# Altium PCB Module Board.PcbDoc (part 6 of 6)
Units mm, origin at the board's own origin, x right, y up, seen from the top; angles counter-clockwise.
Board outline 300 x 80 mm, 4 copper layers (Top Layer, GND1-Layer, GND2-Layer, Bottom Layer), stack 1.586 mm thick; 425 components, 248 nets, 1063 pads, 936 vias.
Unrouted connection lines stored in the file: 3.
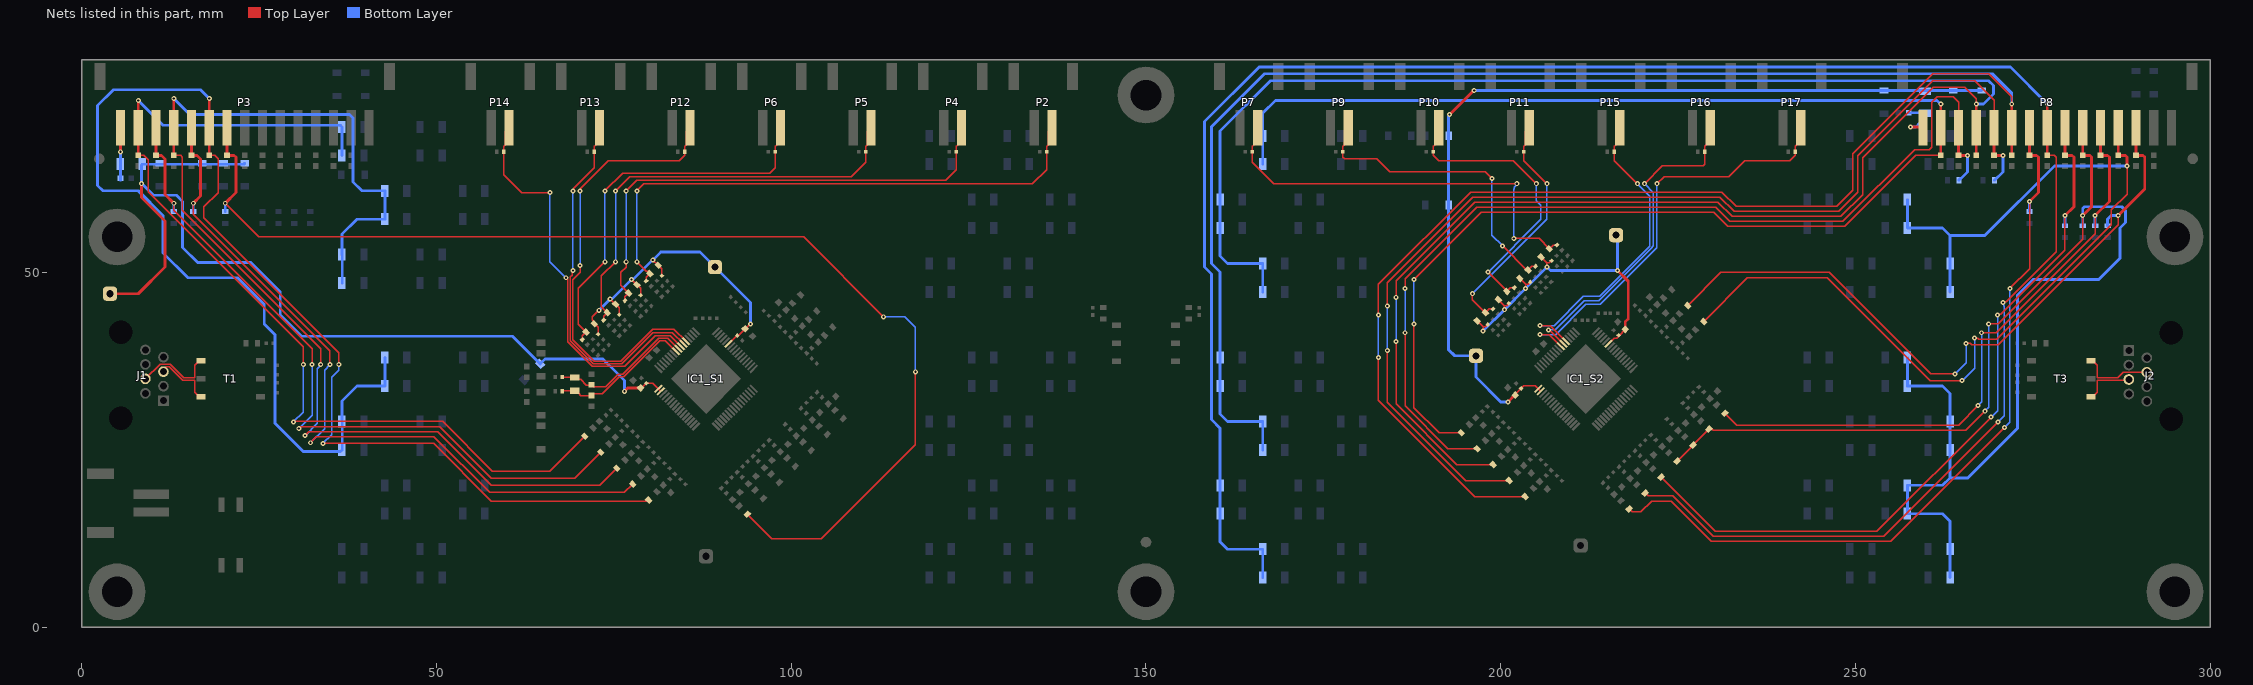
[diagram p7: the nets of this part, all layers, seen from the top]

## Via types
v1: diameter 0.7, hole 0.3, Top Layer to Bottom Layer, 936 vias

## Nets (pads, with @x,y where several pads share a name; then routed paths per layer and width w, separated by ;. In a path a pad name is that pad's centre, name@x,y a point inside that pad or via, vN(x,y) a via of type N, cw(c..) or ccw(c..) an arc to the next point about the centre after c; other vN are vias at no path point) (continued)
S1_CELL7: C30_S1.2 P3.9 R19_S1.2 R20_S1.2 | length 165.1
  Top Layer w0.2: v1(20.25,59.75) 25,55 101.75,55 v1(113,43.75) ; R20_S1.2@93.835,15.915 97.25,12.5 104.25,12.5 117.5,25.75 v1(117.5,36)
  Top Layer w0.4: v1(20.25,59.75) 21.75,61.25 21.75,66.25 21.5,66.5 C30_S1.2@20.5,66.5 P3.9@20.5,70.4
  Bottom Layer w0.2: v1(113,43.75) 116,43.75 117.5,42.25 v1(117.5,36)
  Bottom Layer w0.4: R19_S1.2@20.25,58.577 v1(20.25,59.75)
S1_CELL8: C26_S1.2 P3.10 R17_S1.2 R57_RB_C81.1 R57_RB_C91.1 R59_RB_C81.1 R59_RB_C91.1 | length 216.9
  Top Layer w0.2: C26_S1.2@18,66.5 18.75,66.5 19.25,66 19.25,61.25 17.25,59.25 17.25,57.68 36.25,38.68 v1(36.25,37) ; v1(34,25.9) 49.6,25.9 57.75,17.75 79.527,17.75 79.692,17.915 R17_S1.2@79.915,17.915
  Top Layer w0.4: C26_S1.2@18,66.55 P3.10@18,70.45 ; P3.10@18,70.4 v1(18,74.5)
  Bottom Layer w0.2: v1(34,25.9) 35.25,27.15 35.25,35.25 36.25,36.25 v1(36.25,37)
  Bottom Layer w0.4: v1(18,74.5) 16.75,75.75 4.5,75.75 2.25,73.5 2.25,62.25 3,61.5 8,61.5 11.5,58 11.5,52.75 15,49.25 22,49.25 25.75,45.5 25.75,42.727 27.25,41.227 27.25,28.75 31.25,24.75 36.448,24.75 R57_RB_C81.1@36.698,25 ; R59_RB_C81.1@36.698,29 36.698,31.9 38.798,34 42.746,34 R59_RB_C91.1@42.746,38 ; R57_RB_C81.1@36.746,25 R59_RB_C81.1@36.746,29
S1_CELL9: C19_S1.2 P3.11 R11_S1.1 R13_S1.2 | length 105.6
  Top Layer w0.2: v1(15.75,59.75) 15.75,58.19 35,38.94 v1(35,37) ; v1(32.25,26) 33.1,26.85 49.65,26.85 57.5,19 76.5,19 R13_S1.2@77.665,20.165
  Top Layer w0.4: P3.11@15.5,70.4 C19_S1.2@15.5,66.5 16.25,66.5 16.75,66 16.75,60.75 v1(15.75,59.75)
  Bottom Layer w0.2: v1(32.25,26) 34.25,28 34.25,36.21 35,36.96 v1(35,37)
  Bottom Layer w0.4: R11_S1.1@15.75,58.577 v1(15.75,59.75)
S1_CELL10: C13_S1.2 P3.12 R9_S1.2 R57_RB_C101.1 R57_RB_C1111.1 R59_RB_C101.1 R59_RB_C1111.1 | length 164
  Top Layer w0.2: C13_S1.2@13,66.5 13.966,66.5 14.2,66.266 14.2,58.75 33.7,39.25 v1(33.7,37.003) ; v1(31.5,27) 31.5,27.039 32.011,27.55 50.21,27.55 57.76,20 73,20 R9_S1.2@75.415,22.415
  Top Layer w0.4: C13_S1.2@13,66.5 P3.12@13,70.4 v1(13,74.5)
  Bottom Layer w0.2: v1(31.5,27) 33.25,28.75 33.25,36.445 33.7,36.895 v1(33.7,37.003)
  Bottom Layer w0.4: v1(13,74.5) 15.25,72.25 37.75,72.25 38.25,71.75 38.25,62.75 39.5,61.5 R57_RB_C1111.1@42.698,61.5 ; R59_RB_C101.1@36.698,52.5 36.698,55.4 38.798,57.5 42.746,57.5 R57_RB_C1111.1@42.746,61.5 ; R57_RB_C101.1@36.746,48.5 R59_RB_C101.1@36.746,52.5
S1_CELL11: C5_S1.2 P3.13 R4_S1.2 R7_S1.2 | length 101.1
  Top Layer w0.2: v1(13,59.75) 13,58.74 32.5,39.24 32.5,37.024 v1(32.486,37.01) ; v1(30.617,28) 30.867,28.25 50.5,28.25 57.75,21 69.5,21 R7_S1.2@73.165,24.665
  Top Layer w0.4: P3.13@10.5,70.4 C5_S1.2@10.5,66.5 11.25,66.5 11.75,66 11.75,61 v1(13,59.75)
  Bottom Layer w0.2: v1(30.617,28) 32.486,29.869 v1(32.486,37.01)
  Bottom Layer w0.4: R4_S1.2@13,58.577 v1(13,59.75)
S1_CELL12: C1_S1.2 P3.14 R1_S1.2 R57_RB_C121.1 R59_RB_C121.1 | length 136.2
  Top Layer w0.2: C1_S1.2@8,66.5 8.75,66.5 9.4,65.85 9.4,61.35 31.25,39.5 v1(31.25,37) ; v1(29.855,28.927) 29.928,29 50.881,29 57.881,22 66,22 R1_S1.2@70.915,26.915
  Top Layer w0.4: C1_S1.2@8,66.5 P3.14@8,70.4 v1(8,74.25)
  Bottom Layer w0.2: v1(29.855,28.927) 31.25,30.322 v1(31.25,37)
  Bottom Layer w0.4: v1(8,74.25) 11.5,70.75 36.448,70.75 R57_RB_C121.1@36.698,70.5 R59_RB_C121.1@36.698,66.5
S1_GPIO4: IC1_S1.53 P12.1 R61_S1.1 | length 62.3
  Top Layer w0.2: v1(70.25,51) 70.25,50 69.25,49 69.25,40.5 72.25,37.5 76.01,37.5 80.51,42 81.775,42 83.475,42 IC1_S1.53@85.18,40.295 ; v1(70.25,61.5) 70.346,61.596 70.346,61.846 74.25,65.75 84.25,65.75 85,66.5 85,67.75 85.2,67.95 85.2,69.85 P12.1@85.75,70.4
  Bottom Layer w0.2: v1(70.25,51) v1(70.25,61.5)
S1_GPIO5: IC1_S1.54 P13.1 R62_S1.1 | length 51.4
  Top Layer w0.2: v1(69.25,50.25) 69.154,50.154 69.154,49.619 68.9,49.365 68.9,40.355 72.105,37.15 76.155,37.15 80.505,41.5 81.275,41.5 83.268,41.5 IC1_S1.54@84.827,39.941 ; v1(69.25,61.5) 69.346,61.596 69.346,61.846 72.25,64.75 R62_S1.1@72.25,67 72.25,67.75 72.45,67.95 72.45,69.85 P13.1@73,70.4
  Bottom Layer w0.2: v1(69.25,50.25) v1(69.25,61.5)
S1_GPIO6: IC1_S1.55 P14.1 R63_S1.1 | length 56.4
  Top Layer w0.2: P14.1@60.25,70.4 59.7,69.85 59.7,67.95 59.5,67.75 R63_S1.1@59.5,67 59.5,63.75 62,61.25 v1(66,61.25) ; v1(68.25,49.25) 68.3,49.25 68.55,49 68.55,40.21 71.96,36.8 76.575,36.8 80.875,41.1 82.961,41.1 IC1_S1.55@84.473,39.588
  Bottom Layer w0.2: v1(66,61.25) 66,51.5 v1(68.25,49.25)
S1_ISENSE_N: C66.1 C68.2 IC1_S1.57 R52.2 | length 20.1
  Top Layer w0.2: R52.2@67.75,33.25 67.8,33.3 69.7,33.3 70.05,32.95 70.35,32.65 C68.2@71.85,32.65 72.105,32.905 73.367,32.905 75.3,34.838 75.762,35.3 76.381,35.3 81.481,40.4 82.246,40.4 IC1_S1.57@83.766,38.881
S1_ISENSE_P: C65.2 C66.2 IC1_S1.56 R51.2 | length 20.5
  Top Layer w0.2: R51.2@67.75,35.25 67.8,35.2 C66.2@69.5,35.2 69.783,34.917 70.333,34.917 71.15,34.1 C65.2@71.909,34.1 ; C65.2@71.85,34.15 72.109,33.891 73.859,33.891 75.617,35.65 76.236,35.65 81.336,40.75 82.604,40.75 IC1_S1.56@84.119,39.234
S1_NTC0: C7_S1.2 P2.1 R3_S1.1 R5_S1.2 | length 79
  Top Layer w0.2: v1(78.25,51.5) 79.59,50.16 79.774,50.16 R3_S1.1@80.092,49.842 79.573,49.323 R5_S1.2@79.573,48.78 ; v1(78.25,61.5) 79.25,62.5 134,62.5 136,64.5 C7_S1.2@136,67 136,67.75 136.2,67.95 136.2,69.85 P2.1@136.75,70.4
  Bottom Layer w0.2: v1(78.25,51.5) v1(78.25,61.5)
S1_NTC1: C23_S1.2 P4.1 R12_S1.1 R15_S1.2 | length 70.4
  Top Layer w0.2: R15_S1.2@76.573,46.03 76.573,46.573 R12_S1.1@77.092,47.092 76,48.184 76,50 76.75,50.75 v1(76.75,51.5) ; v1(76.75,61.5) 78.25,63 121.75,63 123.25,64.5 C23_S1.2@123.25,67 123.25,67.75 123.45,67.95 123.45,69.85 P4.1@124,70.4
  Bottom Layer w0.2: v1(76.75,51.5) v1(76.75,61.5)
S1_NTC2: C33_S1.2 P5.1 R22_S1.1 R23_S1.2 | length 61.7
  Top Layer w0.2: R23_S1.2@73.573,43.28 73.573,43.823 R22_S1.1@74.092,44.342 73.25,45.184 73.25,49.5 v1(75.25,51.5) ; v1(75.25,61.5) 77.25,63.5 108.5,63.5 110.5,65.5 C33_S1.2@110.5,67 110.5,67.75 110.7,67.95 110.7,69.85 P5.1@111.25,70.4
  Bottom Layer w0.2: v1(75.25,51.5) v1(75.25,61.5)
S1_NTC3: C44_S1.2 P6.1 R30_S1.1 R31_S1.2 | length 54.5
  Top Layer w0.2: R31_S1.2@70.573,40.53 70.573,41.073 R30_S1.1@71.092,41.592 70,42.684 70,47.75 v1(73.75,51.5) ; v1(73.75,61.5) 76.25,64 97,64 97.75,64.75 C44_S1.2@97.75,67 97.75,67.75 97.95,67.95 97.95,69.85 P6.1@98.5,70.4
  Bottom Layer w0.2: v1(73.75,51.5) v1(73.75,61.5)
S1_VBAT: C60_S1.2 P3.15 R50_S1.1 | length 7.4
  Top Layer w0.4: v1(5.5,67) P3.15@5.5,70.4
  Bottom Layer w0.4: C60_S1.2@5.5,63 5.5,65.198 R50_S1.1@5.448,65.25 5.5,65.302 v1(5.5,67)
S2_CELL1: C57_S2.2 P8.3 R45_S2.2 R46_S2.2 | length 98
  Top Layer w0.2: R46_S2.2@226.335,45.335 231,50 246.25,50 260.55,35.7 v1(264.017,35.7) ; v1(265.574,40) 266.156,40 266.356,39.8 270.113,39.8 287,56.687 v1(287,58)
  Top Layer w0.4: v1(287,58) 290.75,61.75 290.75,66.25 290.5,66.5 C57_S2.2@289.5,66.5 P8.3@289.5,70.4
  Bottom Layer w0.2: v1(264.017,35.7) 265.574,37.257 v1(265.574,40)
  Bottom Layer w0.4: R45_S2.2@285.5,56.577 285.5,57.5 286,58 v1(287,58)
S2_CELL2: C54_S2.2 P8.4 R43_S2.2 R57_RB_C22.1 R57_RB_C32.1 R59_RB_C22.1 R59_RB_C32.1 | length 140.9
  Top Layer w0.2: R43_S2.2@228.585,43.085 234.75,49.25 246,49.25 260.5,34.75 v1(265,34.75) ; v1(266.75,40.75) 266.794,40.706 267.2,40.706 267.356,40.55 269.873,40.55 286.05,56.727 286.05,58.8 288.25,61 v1(288.25,65)
  Top Layer w0.4: P8.4@287,70.4 C54_S2.2@287,66.5 288,66.5 288.25,66.25 v1(288.25,65)
  Bottom Layer w0.2: v1(265,34.75) 266.75,36.5 v1(266.75,40.75)
  Bottom Layer w0.4: R57_RB_C22.1@257.302,60.25 R59_RB_C22.1@257.302,56.25 262.25,56.25 263.302,55.198 ; R57_RB_C32.1@263.302,47.25 R59_RB_C32.1@263.302,51.25 263.302,55.198 ; v1(288.25,65) 278,65 268.198,55.198 263.302,55.198
S2_CELL3: C51_S2.2 P8.5 R40_S2.2 R41_S2.2 | length 88.1
  Top Layer w0.2: R41_S2.2@231.585,30.165 233.25,28.5 264.5,28.5 v1(267.25,31.25) ; v1(267.75,41.5) 269.833,41.5 283.75,55.417 v1(283.75,58)
  Top Layer w0.4: v1(283.75,58) 285.75,60 285.75,66.25 285.5,66.5 C51_S2.2@284.5,66.5 P8.5@284.5,70.4
  Bottom Layer w0.2: v1(267.25,31.25) 267.75,31.75 v1(267.75,41.5)
  Bottom Layer w0.4: R40_S2.2@283.75,56.577 v1(283.75,58)
S2_CELL4: C48_S2.2 P8.6 R33_S2.2 R35_S2.2 R36_S2.2 R38_S2.2 R57_RB_C42.1 R57_RB_C52.1 R57_RB_NA12.1 R57_RB_NA22.1 R59_RB_C42.1 R59_RB_C52.1 R59_RB_NA12.1 R59_RB_NA22.1 | length 205.3
  Top Layer w0.2: R33_S2.2@224.835,23.415 R38_S2.2@229.335,27.915 229.367,27.947 229.72,27.947 229.918,27.75 265.524,27.75 v1(268.22,30.446) ; v1(268.75,42.75) 270.094,42.75 282,54.656 v1(282,58)
  Top Layer w0.4: v1(282,58) 283.25,59.25 283.25,66.25 283,66.5 C48_S2.2@282,66.5 P8.6@282,70.4
  Bottom Layer w0.2: v1(268.22,30.446) 268.22,30.499 268.75,31.029 v1(268.75,42.75)
  Bottom Layer w0.4: R59_RB_C42.1@257.302,34 R59_RB_C42.1@257.315,34 ; R59_RB_C42.1@257.315,33.97 R59_RB_C42.1@257.315,34 ; R57_RB_C42.1@257.315,37.97 R59_RB_C42.1@257.315,34 ; R57_RB_C52.1@263.302,7 R59_RB_C52.1@263.302,11 263.302,14.948 262.25,16 R57_RB_NA22.1@257.302,16 R59_RB_NA22.1@257.302,20 262.25,20 263.302,21.052 ; R35_S2.2@282,56.577 v1(282,58) 282,59.002 282.248,59.25 287.5,59.25 288.05,58.7 288.05,57.05 287.25,56.25 287.25,52 284.25,49 275,49 272.8,46.8 272.8,28.05 265.802,21.052 263.302,21.052 ; R59_RB_C42.1@257.315,34 262.25,34 263.302,32.948 R57_RB_NA12.1@263.302,29 R59_RB_NA12.1@263.302,25 263.302,21.052
S2_CELL5: C39_S2.2 P8.7 R27_S2.2 R28_S2.2 | length 104.7
  Top Layer w0.2: R28_S2.2@222.585,21.165 230.25,13.5 252.971,13.5 v1(269.091,29.62) ; v1(270,44) 270.096,44.096 270.439,44.096 279.5,53.156 v1(279.5,58)
  Top Layer w0.4: v1(279.5,58) 280.75,59.25 280.75,66.25 280.5,66.5 C39_S2.2@279.5,66.5 P8.7@279.5,70.4
  Bottom Layer w0.2: v1(269.091,29.62) 270,30.529 v1(270,44)
  Bottom Layer w0.4: R27_S2.2@279.5,56.578 v1(279.5,58)
S2_CELL6: C36_S2.2 P8.8 R25_S2.2 R57_RB_C62.1 R57_RB_C72.1 R59_RB_C62.1 R59_RB_C72.1 | length 303.3
  Top Layer w0.2: R25_S2.2@220.335,18.915 220.75,18.5 224.25,18.5 229.95,12.8 253.951,12.8 v1(270.05,28.899) ; v1(270.75,45.75) 270.846,45.846 271.189,45.846 278.25,52.906 278.25,66.25 278,66.5 C36_S2.2@277,66.5
  Top Layer w0.4: C36_S2.2@277,66.5 P8.8@277,70.4 v1(277,73.75)
  Bottom Layer w0.2: v1(270.05,28.899) 270.95,29.799 270.95,45.2 270.846,45.304 270.846,45.654 v1(270.75,45.75)
  Bottom Layer w0.4: R59_RB_C62.1@166.448,7 R57_RB_C62.1@166.448,11 161.5,11 160.448,12.052 R59_RB_C72.1@160.448,16 R57_RB_C72.1@160.448,20 160.448,28.052 159.223,29.277 159.223,49.777 158.25,50.75 158.25,71.25 165.95,78.95 271.8,78.95 v1(277,73.75)
S2_CELL7: C30_S2.2 P8.9 R19_S2.2 R20_S2.2 | length 109.4
  Top Layer w0.2: R20_S2.2@218.085,16.665 218.5,16.25 219.75,16.25 221.25,17.75 224,17.75 229.65,12.1 254.934,12.1 v1(271,28.166) ; v1(271.75,47.75) 274.5,50.5 v1(274.5,60)
  Top Layer w0.4: v1(274.5,60) 275.75,61.25 275.75,66.25 275.5,66.5 C30_S2.2@274.5,66.5 P8.9@274.5,70.4
  Bottom Layer w0.2: v1(271,28.166) 271.75,28.916 v1(271.75,47.75)
  Bottom Layer w0.4: R19_S2.2@274.5,58.577 v1(274.5,60)
S2_CELL8: C26_S2.2 P8.10 R17_S2.2 R57_RB_C82.1 R57_RB_C92.1 R59_RB_C82.1 R59_RB_C92.1 | length 328.4
  Top Layer w0.2: v1(182.75,38) 182.75,32 196.335,18.415 R17_S2.2@203.415,18.415 ; v1(182.75,44) 182.75,48.313 195.737,61.3 231.16,61.3 233.16,59.3 247.34,59.3 249.6,61.56 249.6,66.736 260.864,78 268.75,78 272,74.75 v1(272,73.75)
  Top Layer w0.4: C26_S2.2@272,66.5 P8.10@272,70.4 v1(272,73.75)
  Bottom Layer w0.2: v1(182.75,38) v1(182.75,44)
  Bottom Layer w0.4: R59_RB_C82.1@166.448,25 R57_RB_C82.1@166.448,29 161.5,29 160.448,30.052 R59_RB_C92.1@160.448,34 R57_RB_C92.1@160.448,38 160.448,50.052 159.223,51.277 159.223,70.526 166.697,78 252.713,78 269.25,78 272,75.25 v1(272,73.75)
S2_CELL9: C19_S2.2 P8.11 R11_S2.1 R13_S2.2 | length 154.7
  Top Layer w0.2: v1(184,39) 184,31.74 195.075,20.665 R13_S2.2@201.165,20.665 ; v1(184,45.25) 184,48.573 196.027,60.6 230.87,60.6 232.87,58.6 247.63,58.6 250.3,61.27 250.3,66.446 260.854,77 266.75,77 269.5,74.25 P8.11@269.5,70.4
  Top Layer w0.4: P8.11@269.5,70.4 C19_S2.2@269.5,66.5 v1(270.75,66.5)
  Bottom Layer w0.2: v1(184,39) v1(184,45.25)
  Bottom Layer w0.4: R11_S2.1@269.577,63 270.75,64.173 v1(270.75,66.5)
S2_CELL10: C13_S2.2 P8.12 R9_S2.2 R57_RB_C102.1 R57_RB_C1112.1 R59_RB_C102.1 R59_RB_C1112.1 | length 285.4
  Top Layer w0.2: v1(185.25,40.25) 185.25,31.48 193.815,22.915 R9_S2.2@198.915,22.915 ; v1(185.25,46.5) 185.25,48.833 194.917,58.5 196.317,59.9 230.58,59.9 232.58,57.9 247.92,57.9 251,60.98 251,66.156 260.943,76.1 265.4,76.1 267,74.5 v1(267,73.75)
  Top Layer w0.4: C13_S2.2@267,66.5 P8.12@267,70.4 v1(267,73.75)
  Bottom Layer w0.2: v1(185.25,40.25) v1(185.25,46.5)
  Bottom Layer w0.4: R59_RB_C102.1@166.448,47.25 R57_RB_C102.1@166.448,51.25 161.5,51.25 160.448,52.302 R57_RB_C1112.1@160.448,56.25 R59_RB_C1112.1@160.448,60.25 160.448,69.948 167.5,77 268.75,77 269.417,76.333 269.417,75.167 268,73.75 v1(267,73.75)
S2_CELL11: C5_S2.2 P8.13 R4_S2.2 R7_S2.2 | length 137.7
  Top Layer w0.2: v1(186.5,41.5) 186.5,31.22 192.555,25.165 R7_S2.2@196.665,25.165 ; v1(186.5,47.75) 186.5,49.094 196.606,59.2 230.29,59.2 232.29,57.2 248.21,57.2 258.31,67.3 260.399,67.3 260.75,67.651 260.75,74 261.5,74.75 263.75,74.75 264.5,74 P8.13@264.5,70.4
  Top Layer w0.4: P8.13@264.5,70.4 C5_S2.2@264.5,66.5 v1(265.75,66.5)
  Bottom Layer w0.2: v1(186.5,41.5) v1(186.5,47.75)
  Bottom Layer w0.4: R4_S2.2@264.577,63 264.577,63.1 264.727,63.25 264.827,63.25 265.75,64.173 v1(265.75,66.5)
S2_CELL12: C1_S2.2 P8.14 R1_S2.2 R57_RB_C122.1 R59_RB_C122.1 | length 220.3
  Top Layer w0.2: v1(187.75,42.75) 187.75,30.96 191.295,27.415 R1_S2.2@194.415,27.415 ; v1(187.75,49) 197.25,58.5 230,58.5 232,56.5 248.5,56.5 258.5,66.5 C1_S2.2@262,66.5
  Top Layer w0.4: C1_S2.2@262,66.5 P8.14@262,70.4 v1(262,73.75)
  Bottom Layer w0.2: v1(187.75,42.75) 187.754,42.754 187.754,46.033 187.75,46.036 v1(187.75,49)
  Bottom Layer w0.4: R59_RB_C122.1@166.448,65.25 R57_RB_C122.1@166.448,69.25 166.448,72.448 168.25,74.25 261.483,74.25 261.983,73.75 v1(262,73.75)
S2_GPIO4: IC1_S2.53 P15.1 R61_S2.1 | length 43.8
  Top Layer w0.2: v1(205.5,42.5) 206.975,42.5 IC1_S2.53@209.18,40.295 ; P15.1@216.75,70.4 216.2,69.85 216.2,67.95 216,67.75 216,65.75 v1(219.25,62.5)
  Bottom Layer w0.2: v1(205.5,42.5) 207.5,42.5 211.625,46.625 213.925,46.625 221,53.7 221,60.75 v1(219.25,62.5)
S2_GPIO5: IC1_S2.54 P16.1 R62_S2.1 | length 47
  Top Layer w0.2: v1(206.726,41.9) 206.85,41.9 208.809,39.941 IC1_S2.54@208.827,39.941 ; v1(220.25,62.5) 222.75,65 228.5,65 228.75,65.25 R62_S2.1@228.75,67 228.75,67.8 229.5,68.55 P16.1@229.5,70.4
  Bottom Layer w0.2: v1(206.726,41.9) 207.65,41.9 211.75,46 213.795,46 221.35,53.555 221.35,53.6 221.5,53.75 221.5,61.25 v1(220.25,62.5)
S2_GPIO6: IC1_S2.55 P17.1 R63_S2.1 | length 59.6
  Top Layer w0.2: v1(205.5,41.25) 206.811,41.25 IC1_S2.55@208.473,39.588 ; v1(222,62.5) 223,63.5 232.125,63.5 234.375,65.75 240.75,65.75 241.5,66.5 R63_S2.1@241.5,67 241.5,67.8 242.25,68.55 P17.1@242.25,70.4
  Bottom Layer w0.2: v1(205.5,41.25) 207.741,41.25 211.991,45.5 214,45.5 222,53.5 v1(222,62.5)
S2_NTC0: C7_S2.2 P7.1 R3_S2.1 R5_S2.2 | length 58.5
  Top Layer w0.2: P7.1@165.75,70.4 165.2,69.85 165.2,67.95 165,67.75 C7_S2.2@165,67 165,65.5 168,62.5 v1(202.25,62.5) ; v1(201.826,54.783) 205.386,54.783 R3_S2.1@206.835,53.335 207.354,53.854 R5_S2.2@207.896,53.854
  Bottom Layer w0.2: v1(201.826,54.783) 201.826,61.755 201.88,61.809 201.88,61.995 202.25,62.365 v1(202.25,62.5)
S2_NTC1: C23_S2.2 P9.1 R12_S2.1 R15_S2.2 | length 43.1
  Top Layer w0.2: P9.1@178.5,70.4 177.95,69.85 177.95,67.95 177.75,67.75 177.75,66.25 178,66 182.5,66 184.327,64.173 197.827,64.173 v1(198.75,63.25) ; v1(200.25,53.75) 203.665,50.335 R12_S2.1@203.835,50.335 204.354,50.854 R15_S2.2@204.896,50.854
  Bottom Layer w0.2: v1(198.75,63.25) 198.75,55.25 v1(200.25,53.75)
S2_NTC2: C33_S2.2 P10.1 R22_S2.1 R23_S2.2 | length 41.3
  Top Layer w0.2: P10.1@191.25,70.4 190.7,69.85 190.7,67.95 190.5,67.75 190.5,66.5 191.25,65.75 201.75,65.75 v1(205,62.5) ; v1(198.201,50.049) 200.835,47.415 R22_S2.1@200.835,47.335 201.354,47.854 R23_S2.2@201.896,47.854
  Bottom Layer w0.2: v1(198.201,50.049) 205.65,57.499 205.65,59.482 205,60.132 v1(205,62.5)
S2_NTC3: C44_S2.2 P11.1 R30_S2.1 R31_S2.2 | length 34.1
  Top Layer w0.2: v1(196,47) 196,46.17 R30_S2.1@197.835,44.335 198.354,44.854 R31_S2.2@198.595,44.854 ; R31_S2.2@198.646,44.854 R31_S2.2@198.896,44.854 ; P11.1@204,70.4 203.45,69.85 203.45,67.95 203.25,67.75 203.25,65.75 v1(206.5,62.5)
  Bottom Layer w0.2: v1(196,47) 206.5,57.5 v1(206.5,62.5)
S2_VBAT: C60_S2.2 P8.15 R50_S2.1 | length 7.5
  Top Layer w0.4: v1(257.75,70.5) 259.4,70.5 P8.15@259.5,70.4
  Bottom Layer w0.4: C60_S2.2@257.5,72.5 259.698,72.5 R50_S2.1@259.75,72.448 259.425,72.448 259.1,72.123 259.1,71.1 258.5,70.5 v1(257.75,70.5)
TPL_IN_N: J1.5 T1.3 | length 8.5
  Top Layer w0.2: J1.5@11.54,36.02 11.54,36.281 11.969,36.71 12.38,36.71 14.265,34.825 15.866,34.825 15.925,34.766 15.925,33.09 16.555,32.46 T1.3@16.81,32.46
TPL_IN_P: J1.4 T1.1 | length 11.4
  Top Layer w0.2: J1.4@9,35 11.06,37.06 12.525,37.06 14.41,35.175 15.866,35.175 15.925,35.234 15.925,36.91 16.555,37.54 T1.1@16.81,37.54
TPL_OUT_N: J2.5 T3.1 | length 7.3
  Top Layer w0.2: T3.1@283.19,32.46 283.445,32.46 284.075,33.09 284.075,34.766 284.134,34.825 288.415,34.825 J2.5@288.5,34.91
TPL_OUT_P: J2.4 T3.3 | length 10.1
  Top Layer w0.2: T3.3@283.19,37.54 283.445,37.54 284.075,36.91 284.075,35.234 284.134,35.175 286.925,35.175 287.68,35.93 J2.4@291.04,35.93
VCOM_S1: C3_S1.2 C16_S1.2 C17_S1.2 C18_S1.2 C29_S1.2 C41_S1.2 IC1_S1.43 R3_S1.2 R12_S1.2 R22_S1.2 R30_S1.2 TP3_S1.1 | length 47.1
  Top Layer w0.2: C41_S1.2@72.78,41.281 72.78,42.243 R30_S1.2@72.262,42.762 72.262,43.083 72,43.345 72,43.75 v1(72.918,44.668) ; v1(74.5,46.25) 74.523,46.25 75.78,44.993 C29_S1.2@75.78,44.031 ; v1(77.5,49) 77.523,49 R12_S1.2@78.262,48.262 78.78,47.743 C18_S1.2@78.78,46.781 ; v1(80.5,51.75) 80.523,51.75 R3_S1.2@81.262,51.012 81.78,50.493 C3_S1.2@81.78,49.531 ; IC1_S1.43@91.173,39.941 92.336,41.104 92.543,41.104 C17_S1.2@93.503,42.063 93.563,42.063 v1(94.25,42.75)
  Bottom Layer w0.4: v1(72.918,44.668) v1(74.5,46.25) ; v1@74.557,46.307 74.807,46.307 v1(77.5,49) ; v1@77.557,49.057 77.77,49.057 80.462,51.75 v1(80.5,51.75) ; v1@80.512,51.75 81.631,52.869 87.131,52.869 94.25,45.75 v1(94.25,42.75)
VCOM_S2: C3_S2.2 C16_S2.2 C17_S2.2 C18_S2.2 C29_S2.2 C41_S2.2 IC1_S2.43 R3_S2.2 R12_S2.2 R22_S2.2 R30_S2.2 TP3_S2.1 | length 50.3
  Top Layer w0.2: R30_S2.2@196.665,43.165 197.5,42.33 ; v1(197.5,41.75) 197.5,42.33 ; C41_S2.2@198.146,42.646 197.831,42.33 197.5,42.33 ; R22_S2.2@199.665,46.165 200.5,45.33 ; v1(200.5,44.75) 200.5,45.33 ; C29_S2.2@201.146,45.646 200.831,45.33 200.5,45.33 ; R12_S2.2@202.665,49.165 203.5,48.33 ; v1(203.5,47.75) 203.5,48.33 ; C18_S2.2@204.146,48.646 203.831,48.33 203.5,48.33 ; R3_S2.2@205.665,52.165 206.5,51.33 ; v1(206.5,50.75) 206.5,51.33 ; C3_S2.2@207.146,51.646 206.831,51.33 206.5,51.33 ; IC1_S2.43@215.173,39.941 215.982,40.75 216.311,40.75 216.655,41.095 C17_S2.2@217.53,41.97
  Top Layer w0.4: v1(216.449,50.25) 217.95,48.749 217.95,43.46 217.645,43.155 217.53,43.04 C17_S2.2@217.53,41.97
  Bottom Layer w0.4: v1(197.5,41.75) v1(200.5,44.75) v1(203.5,47.75) v1(206.5,50.75) 207,50.25 v1(216.449,50.25) ; TP3_S2.1@216.25,55.25 216.449,55.051 v1@216.449,50.331
VPWR_S1: C11_S1.2 C12_S1.2 D1_S1.1 D2_S1.1 D3_S1.1 D4_S1.1 D5_S1.1 IC1_S1.1 IC1_S1.2 R50_S1.2 TP2_S1.1 | length 133.1
  Top Layer w0.2: C11_S1.2@78.78,33.72 78.927,33.72 C12_S1.2@79.604,34.396 80.489,34.396 IC1_S1.1@81.291,33.594 IC1_S1.2@81.645,33.241
  Top Layer w0.4: TP2_S1.1@4,47 8,47 11.75,50.75 11.75,57.25 8.45,60.55 v1(8.45,62.5) ; v1(76.5,33.25) 76.97,33.72 C11_S1.2@78.78,33.72
  Bottom Layer w0.4: D1_S1.1@23,65.385 22.865,65.25 20,65.25 17,65.25 11,65.25 R50_S1.2@8.552,65.25 8.45,65.148 v1(8.45,62.5) 8.5,62.5 10.125,60.875 13.36,60.875 14.25,59.985 14.25,53.523 16.373,51.4 23.85,51.4 28,47.25 28,43.984 30.984,41 60.75,41 D3_S1.1@64.64,37.11 ; D3_S1.1@64.626,37.126 65.3,37.8 73.45,37.8 75.513,35.738 76.5,34.75 v1(76.5,33.25)
VPWR_S2: C11_S2.2 C12_S2.2 D1_S2.1 D2_S2.1 D3_S2.1 D4_S2.1 D5_S2.1 IC1_S2.1 IC1_S2.2 R50_S2.2 TP2_S2.1 | length 128.7
  Top Layer w0.2: C11_S2.2@202.03,32.72 202.03,32.823 C12_S2.2@202.854,33.646 203.207,34 204.885,34 IC1_S2.1@205.291,33.594 IC1_S2.2@205.645,33.241
  Top Layer w0.4: v1(192.75,72.25) 192.807,72.25 196.193,75.635 v1(196.25,75.635) ; v1(201,31.75) 201.97,32.72 C11_S2.2@202.03,32.72
  Bottom Layer w0.4: v1(192.75,72.25) 192.75,72.169 192.635,72.054 D2_S2.1@192.635,69.25 D3_S2.1@192.635,59.5 192.635,39.115 193.5,38.25 TP2_S2.1@196.5,38.25 196.5,35.25 200,31.75 v1(201,31.75) ; v1(196.25,75.635) D4_S2.1@254,75.635 D5_S2.1@263.75,75.635 D1_S2.1@267.75,75.635
pads on no net: *1. *3. *5. IC1_S1.40 IC1_S1.42 IC1_S1.61 IC1_S1.62 IC1_S2.40 IC1_S2.42 IC1_S2.61 IC1_S2.62 J1.1 J1.2 J1.3 J1.6 J1.7 J1.8 J1.9 J1.10 J2.1 J2.2 J2.3 J2.6 J2.7 J2.8 J2.9 J2.10 P1.3 P1.4 P2.3 P2.4 P3.16 P3.17 P4.3 P4.4 P5.3 P5.4 P6.3 P6.4 P7.3 P7.4 P8.16 P8.17 P9.3 P9.4 P10.3 P10.4 P11.3 P11.4 P12.3 P12.4 P13.3 P13.4 P14.3 P14.4 P15.3 P15.4 P16.3 P16.4 P17.3 P17.4 T1.2 T3.2

## Polygon pours and split planes (outlines as drawn)
GND_S2 on Top Layer "GND_S2_L01_P000" (solid, pour order 0): 150,0 300,0 300,80 150,80
GND_S1 on Top Layer "GND_S1_L01_P001" (solid, pour order 1): 0,0 150,0 150,80 0,80
GND_S2 on Bottom Layer "GND_S2_L04_P002" (solid, pour order 2): 150,0 300,0 300,80 150,80
GND_S1 on Bottom Layer "GND_S1_L04_P003" (solid, pour order 3): 0,0 150,0 150,80 0,80
GND_S1 on GND2-Layer (split plane): 142,49 145.81,45.19 145.81,34.81 142,31 142,0.51 0.51,0.51 0.51,26.74 24.25,26.74 24.25,44.24 0.51,44.24 0.51,79.49 142,79.49
GND_S2 on GND2-Layer (split plane): 299.49,44.15 275.75,44.15 275.75,26.65 299.49,26.65 299.49,0.51 158,0.51 158,31 154.19,34.81 154.19,45.19 158,49 158,79.49 299.49,79.49
GND_S1 on GND1-Layer (split plane): 142,49 145.81,45.19 145.81,34.81 142,31 142,0.51 0.51,0.51 0.51,26.74 24.25,26.74 24.25,44.24 0.51,44.24 0.51,79.49 142,79.49
GND_S2 on GND1-Layer (split plane): 299.49,44.15 275.75,44.15 275.75,26.65 299.49,26.65 299.49,0.51 158,0.51 158,31 154.19,34.81 154.19,45.19 158,49 158,79.49 299.49,79.49

## Keep-outs
Keep-Out Layer:
  the board outline again, w0.7

## Other copper
Top Layer:
  pour cut-out: 0,26.75 0.01,26.74 24.25,26.74 24.25,44.24 0,44.24
  pour cut-out: 292.5,68 292.5,72.75 259,72.75 259,68
  pour cut-out: 38.5,68 38.5,72.75 5,72.75 5,68
  pour cut-out: 300,50 290,50 290,60 300,60
  pour cut-out: 300,0 288,0 288,12 300,12
  pour cut-out: 0,49 0,60.6 11,60.6 11,49
  pour cut-out: 0,0 0,12 12,12 12,0
  pour cut-out: 300,26.66 299.99,26.65 275.75,26.65 275.75,44.15 300,44.15
  pour cut-out: 142,0 142,31 145.81,34.81 145.81,45.19 142,49 142,80 158,80 158,49 154.19,45.19 154.19,34.81 158,31 158,0
Bottom Layer:
  pour cut-out: 300,26.66 299.99,26.65 275.75,26.65 275.75,44.15 300,44.15
  pour cut-out: 0,0 0,12 12,12 12,0
  pour cut-out: 0,49 0,60.6 11,60.6 11,49
  pour cut-out: 300,0 288,0 288,12 300,12
  pour cut-out: 300,50 290,50 290,60 300,60
  pour cut-out: 142,0 142,31 145.81,34.81 145.81,45.19 142,49 142,80 158,80 158,49 154.19,45.19 154.19,34.81 158,31 158,0
  pour cut-out: 0,26.75 0.01,26.74 24.25,26.74 24.25,44.24 0,44.24
GND1-Layer (plane layer: these items are gaps in the copper):
  pour cut-out: 300,26.66 299.99,26.65 275.75,26.65 275.75,44.15 300,44.15
  pour cut-out: 0,26.75 0.01,26.74 24.25,26.74 24.25,44.24 0,44.24
  pour cut-out: 142,0 142,31 145.81,34.81 145.81,45.19 142,49 142,80 158,80 158,49 154.19,45.19 154.19,34.81 158,31 158,0
GND2-Layer (plane layer: these items are gaps in the copper):
  pour cut-out: 0,26.75 0.01,26.74 24.25,26.74 24.25,44.24 0,44.24
  pour cut-out: 142,0 142,31 145.81,34.81 145.81,45.19 142,49 142,80 158,80 158,49 154.19,45.19 154.19,34.81 158,31 158,0
  pour cut-out: 300,26.66 299.99,26.65 275.75,26.65 275.75,44.15 300,44.15

## Silkscreen, mask and mechanical layers (free items; w line width, h text height)
Top Overlay:
  lines w0.254: 4.25,60.75 4.25,71.7 ; 6.75,60.75 6.75,71.7 ; 9.25,60.75 9.25,71.7 ; 11.75,60.75 11.75,71.7 ; 12.248,60.525 12.375,60.375 ; 14.25,60.75 14.25,71.7 ; 16.75,60.75 16.75,71.7 ; 19.25,60.8 19.25,71.75 ; 21.75,60.75 21.75,71.7 ; 24.25,60.75 24.25,71.7 ; 26.75,60.75 26.75,71.7 ; 29.25,60.75 29.25,71.7 ; 31.75,60.75 31.75,71.7 ; 34.25,60.75 34.25,71.7 ; 36.75,60.75 36.75,71.7 ; 39.25,60.75 39.25,71.7 ; 41.75,60.75 41.75,71.7 ; 142,0.5 120,0.5 120,6.5 140,6.5 142,6.5 ; 158,0.5 180,0.5 180,6.75 158,6.75 ; 258.25,60.75 258.25,71.7 ; 260.75,60.75 260.75,71.7 ; 263.25,60.75 263.25,71.7 ; 265.75,60.75 265.75,71.7 ; 266.248,60.525 266.375,60.375 ; 268.25,60.75 268.25,71.7 ; 270.75,60.75 270.75,71.7 ; 273.25,60.8 273.25,71.75 ; 275.75,60.75 275.75,71.7 ; 278.25,60.75 278.25,71.7 ; 280.75,60.75 280.75,71.7 ; 283.25,60.75 283.25,71.7 ; 285.75,60.75 285.75,71.7 ; 288.25,60.75 288.25,71.7 ; 290.75,60.75 290.75,71.7 ; 293.25,60.75 293.25,71.7 ; 295.75,60.75 295.75,71.7
  lines w0.3: 15.5,7 15.5,23.25 26.5,23.25 26.5,7
  lines w0.5: 0.5,26 28.5,26 ; 0.5,44.5 28.5,44.5 28.5,26 ; 0.633,60.525 12.248,60.525 45.25,60.625 ; 12.375,60.375 12.375,55.5 45.25,55.5 45.25,79.5 ; 28.5,7.25 28.5,6.75 12,6.75 12,0.5 28.5,0.5 28.5,26 ; 52.5,79.5 52.5,61.25 142,61.25 ; 65.25,61.275 65.25,79.5 ; 78,61.25 78,79.5 ; 90.75,61.25 90.75,79.5 ; 103.5,61.275 103.5,79.5 ; 116.25,61.25 116.25,79.5 ; 129,61.5 129,79.5 ; 142,0.5 142,31 145.75,34.75 146.38,35.38 146.38,35.935 ; 142,0.51 120.01,0.51 120,0.52 120,6.5 142,6.5 ; 142,79.5 142,49 145.75,45.25 146.38,44.62 146.38,44.065 ; 153.62,35.935 153.62,35.38 154.25,34.75 158,31 158,0.5 ; 153.62,44.065 153.62,44.62 154.25,45.25 158,49 158,79.5 ; 158,61.25 247.5,61.25 247.5,79.5 ; 171,61.5 171,79.5 ; 183.75,61.25 183.75,79.5 ; 196.5,61.275 196.5,79.5 ; 209.25,61.25 209.25,79.5 ; 222,61.25 222,79.5 ; 234.75,61.275 234.75,79.5 ; 253,60.525 266.248,60.525 299.25,60.625 ; 253,79.25 253,55.3 286,55.3 286,60.5 ; 299.16,25.91 271.54,25.91 271.54,44.41 299.16,44.41 ; 158,0.5 180,0.5 ; 158,0.5 158,6.75 180,6.75 180,0.5 ; 180,0.5 180,0.5
  lines w1: 147,50 155,50 ; 153,48 155,50 ; 153,52 155,50
  text "G" at 38.483,62 h1.52 r90
  text "G" at 40.983,62 h1.52 r90
  text "G" at 292.483,62 h1.52 r90
  text "G" at 294.983,62 h1.52 r90
  text "C5" at 25.983,61.55 h1.52 r90
  text "C4" at 28.483,61.55 h1.52 r90
  text "C5" at 279.983,61.55 h1.52 r90
  text "C4" at 282.483,61.55 h1.52 r90
  text "C9" at 15.983,61.5 h1.52 r90
  text "C8" at 18.483,61.5 h1.52 r90
  text "C7" at 20.983,61.5 h1.52 r90
  text "C6" at 23.483,61.5 h1.52 r90
  text "C3" at 30.983,61.5 h1.52 r90
  text "C2" at 33.483,61.5 h1.52 r90
  text "C1" at 35.983,61.5 h1.52 r90
  text "C9" at 269.983,61.5 h1.52 r90
  text "C8" at 272.483,61.5 h1.52 r90
  text "C7" at 274.983,61.5 h1.52 r90
  text "C6" at 277.483,61.5 h1.52 r90
  text "C3" at 284.983,61.5 h1.52 r90
  text "C2" at 287.483,61.5 h1.52 r90
  text "C1" at 289.983,61.5 h1.52 r90
  text "IO6" at 52.5,61.211 h4
  text "IO5" at 65.25,61.211 h4
  text "IO4" at 78,61.211 h4
  text "NTC3" at 90.75,61.211 h4
  text "NTC2" at 103.5,61.211 h4
  text "NTC1" at 116.25,61.211 h4
  text "NTC0" at 129,61.211 h4
  text "NTC0" at 158,61.211 h4
  text "NTC1" at 171,61.211 h4
  text "NTC2" at 183.75,61.211 h4
  text "NTC3" at 196.5,61.211 h4
  text "IO4" at 209.25,61.211 h4
  text "IO5" at 222,61.211 h4
  text "IO6" at 234.75,61.211 h4
  text "C12" at 5.983,61 h1.52 r90
  text "C12" at 8.483,61 h1.52 r90
  text "C11" at 10.983,61 h1.52 r90
  text "C10" at 13.483,61 h1.52 r90
  text "C12" at 259.983,61 h1.52 r90
  text "C12" at 262.483,61 h1.52 r90
  text "C11" at 264.983,61 h1.52 r90
  text "C10" at 267.483,61 h1.52 r90
  text "CELL TERMINALS" at 253.033,55.461 h4
  text "CELL TERMINALS" at 12.317,55.438 h4
  text "VCOM" at 217.75,54.767 h1.52
  text "VCOM" at 90.75,50.267 h1.52
  text "VPWR" at 5.5,46.5 h1.52
  text "VPWR" at 198,37.75 h1.52
  text "TPL OUT" at 271.29,26 h4
  text "TPL IN" at 12.5,25.961 h4
  text "Disable" at 15.594,19.266 h3
  text "GND" at 212.75,11.017 h1.52
  text "! Warning ! /  / When current sense is NOT used / DIP switch needs to be ON" at 27.744,9.595 h3
  text "GND" at 89.5,9.517 h1.52
  text "FlexBMS ModuleBoard / V1.0 /  / Bram Bremer / 09/07/2026" at 230.625,5.57 h4
  text "SLAVE 1" at 120,0.5 h5
  text "SLAVE 2" at 158,0.5 h5
  text "ISENSE" at 12,0.314 h4
Bottom Overlay:
  lines w0.3: 33,3.25 60.75,3.25 60.75,72.5 33,72.5 33,3.25 ; 115.75,3.25 143.5,3.25 143.5,71 115.75,71 115.75,3.25 ; 156.75,3.25 182.5,3.25 182.5,71 156.75,71 156.75,3.25 ; 239.5,3.25 267.25,3.25 267.25,71 239.5,71 239.5,3.25
  text "CAUTION: HOT" at 62,73.5 h3
  text "CAUTION: HOT" at 250.5,72.031 h3
  text "CAUTION: HOT" at 138,72 h3
  text "CAUTION: HOT" at 180.5,72 h3
Layer stack up:
  drawing of 394 lines, arcs and shapes, not listed
  text "Layer" at 0.798,163.046 h1.52
  text "Name" at 11.21,163.046 h1.52
  text "Material" at 34.825,163.046 h1.52
  text "Thickness" at 56.663,163.046 h1.52
  text "Constant" at 73.169,163.046 h1.52
  text "Board Layer Stack" at 87.644,163.046 h1.52
  text "Top Overlay" at 11.21,159.998 h1.52
  text "Top Solder" at 11.21,156.95 h1.52
  text "Solder Resist" at 34.825,156.95 h1.52
  text "0,010mm" at 56.663,156.95 h1.52
  text "3.8" at 73.169,156.95 h1.52
  text "1" at 0.798,153.902 h1.52
  text "Top Layer" at 11.21,153.902 h1.52
  text "0,035mm" at 56.663,153.902 h1.52
  text "Dielectric1" at 11.21,150.854 h1.52
  text "FR-4" at 34.825,150.854 h1.52
  text "0,210mm" at 56.663,150.854 h1.52
  text "4.4" at 73.169,150.854 h1.52
  text "2" at 0.798,147.806 h1.52
  text "GND1-Layer" at 11.21,147.806 h1.52
  text "0,015mm" at 56.663,147.806 h1.52
  text "Dielectric2" at 11.21,144.758 h1.52
  text "FR-4" at 34.825,144.758 h1.52
  text "1,065mm" at 56.663,144.758 h1.52
  text "4.6" at 73.169,144.758 h1.52
  text "3" at 0.798,141.71 h1.52
  text "GND2-Layer" at 11.21,141.71 h1.52
  text "0,015mm" at 56.663,141.71 h1.52
  text "Dielectric3" at 11.21,138.662 h1.52
  text "FR-4" at 34.825,138.662 h1.52
  text "0,210mm" at 56.663,138.662 h1.52
  text "4.4" at 73.169,138.662 h1.52
  text "4" at 0.798,135.614 h1.52
  text "Bottom Layer" at 11.21,135.614 h1.52
  text "0,035mm" at 56.663,135.614 h1.52
  text "Bottom Solder" at 11.21,132.566 h1.52
  text "Solder Resist" at 34.825,132.566 h1.52
  text "0,010mm" at 56.663,132.566 h1.52
  text "3.8" at 73.169,132.566 h1.52
  text "Bottom Overlay" at 11.21,129.518 h1.52
  text "Total board thickness:" at 0.798,126.47 h1.52
  text "1,607mm" at 56.663,126.47 h1.52